# Altium PCB led灯板NO.3pcb.PcbDoc
Units mil, origin at the board's own origin, x right, y up, seen from the top; angles counter-clockwise.
Board outline 2362.2 x 2362.2 mil, 2 copper layers (Top Layer, Bottom Layer); 236 components, 31 nets, 491 pads, 233 vias.
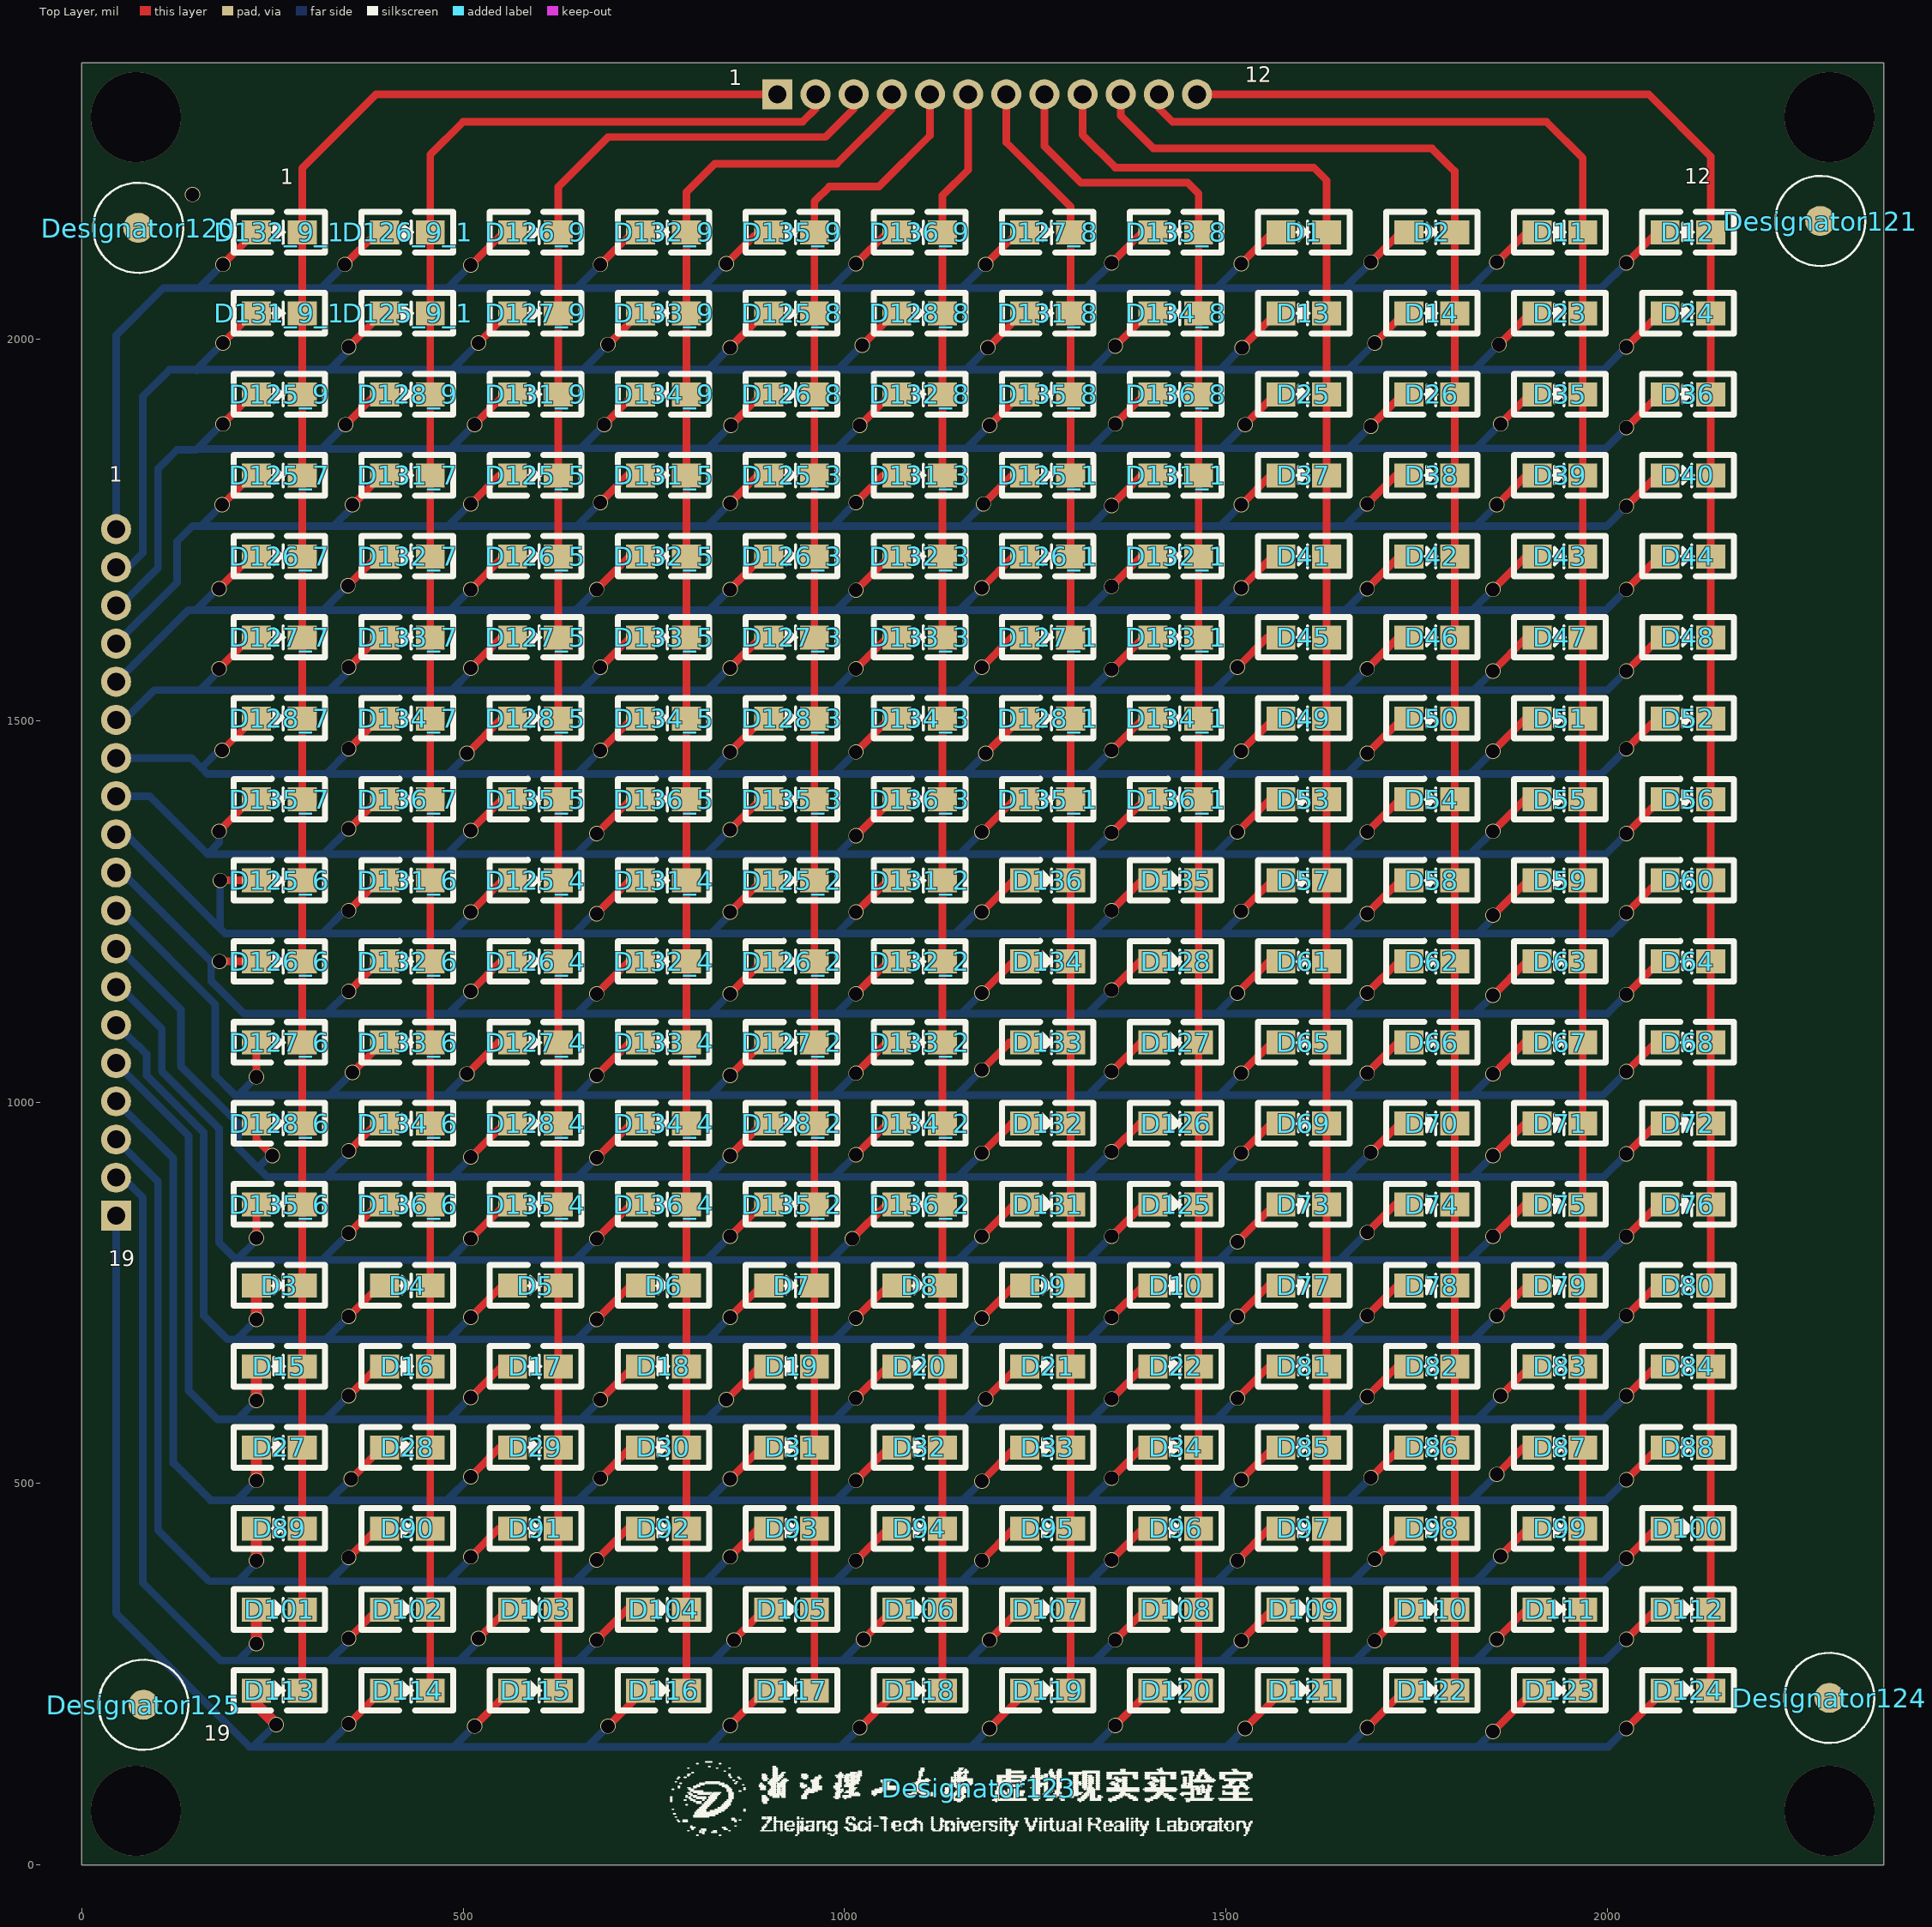
[diagram p0: Top Layer view]
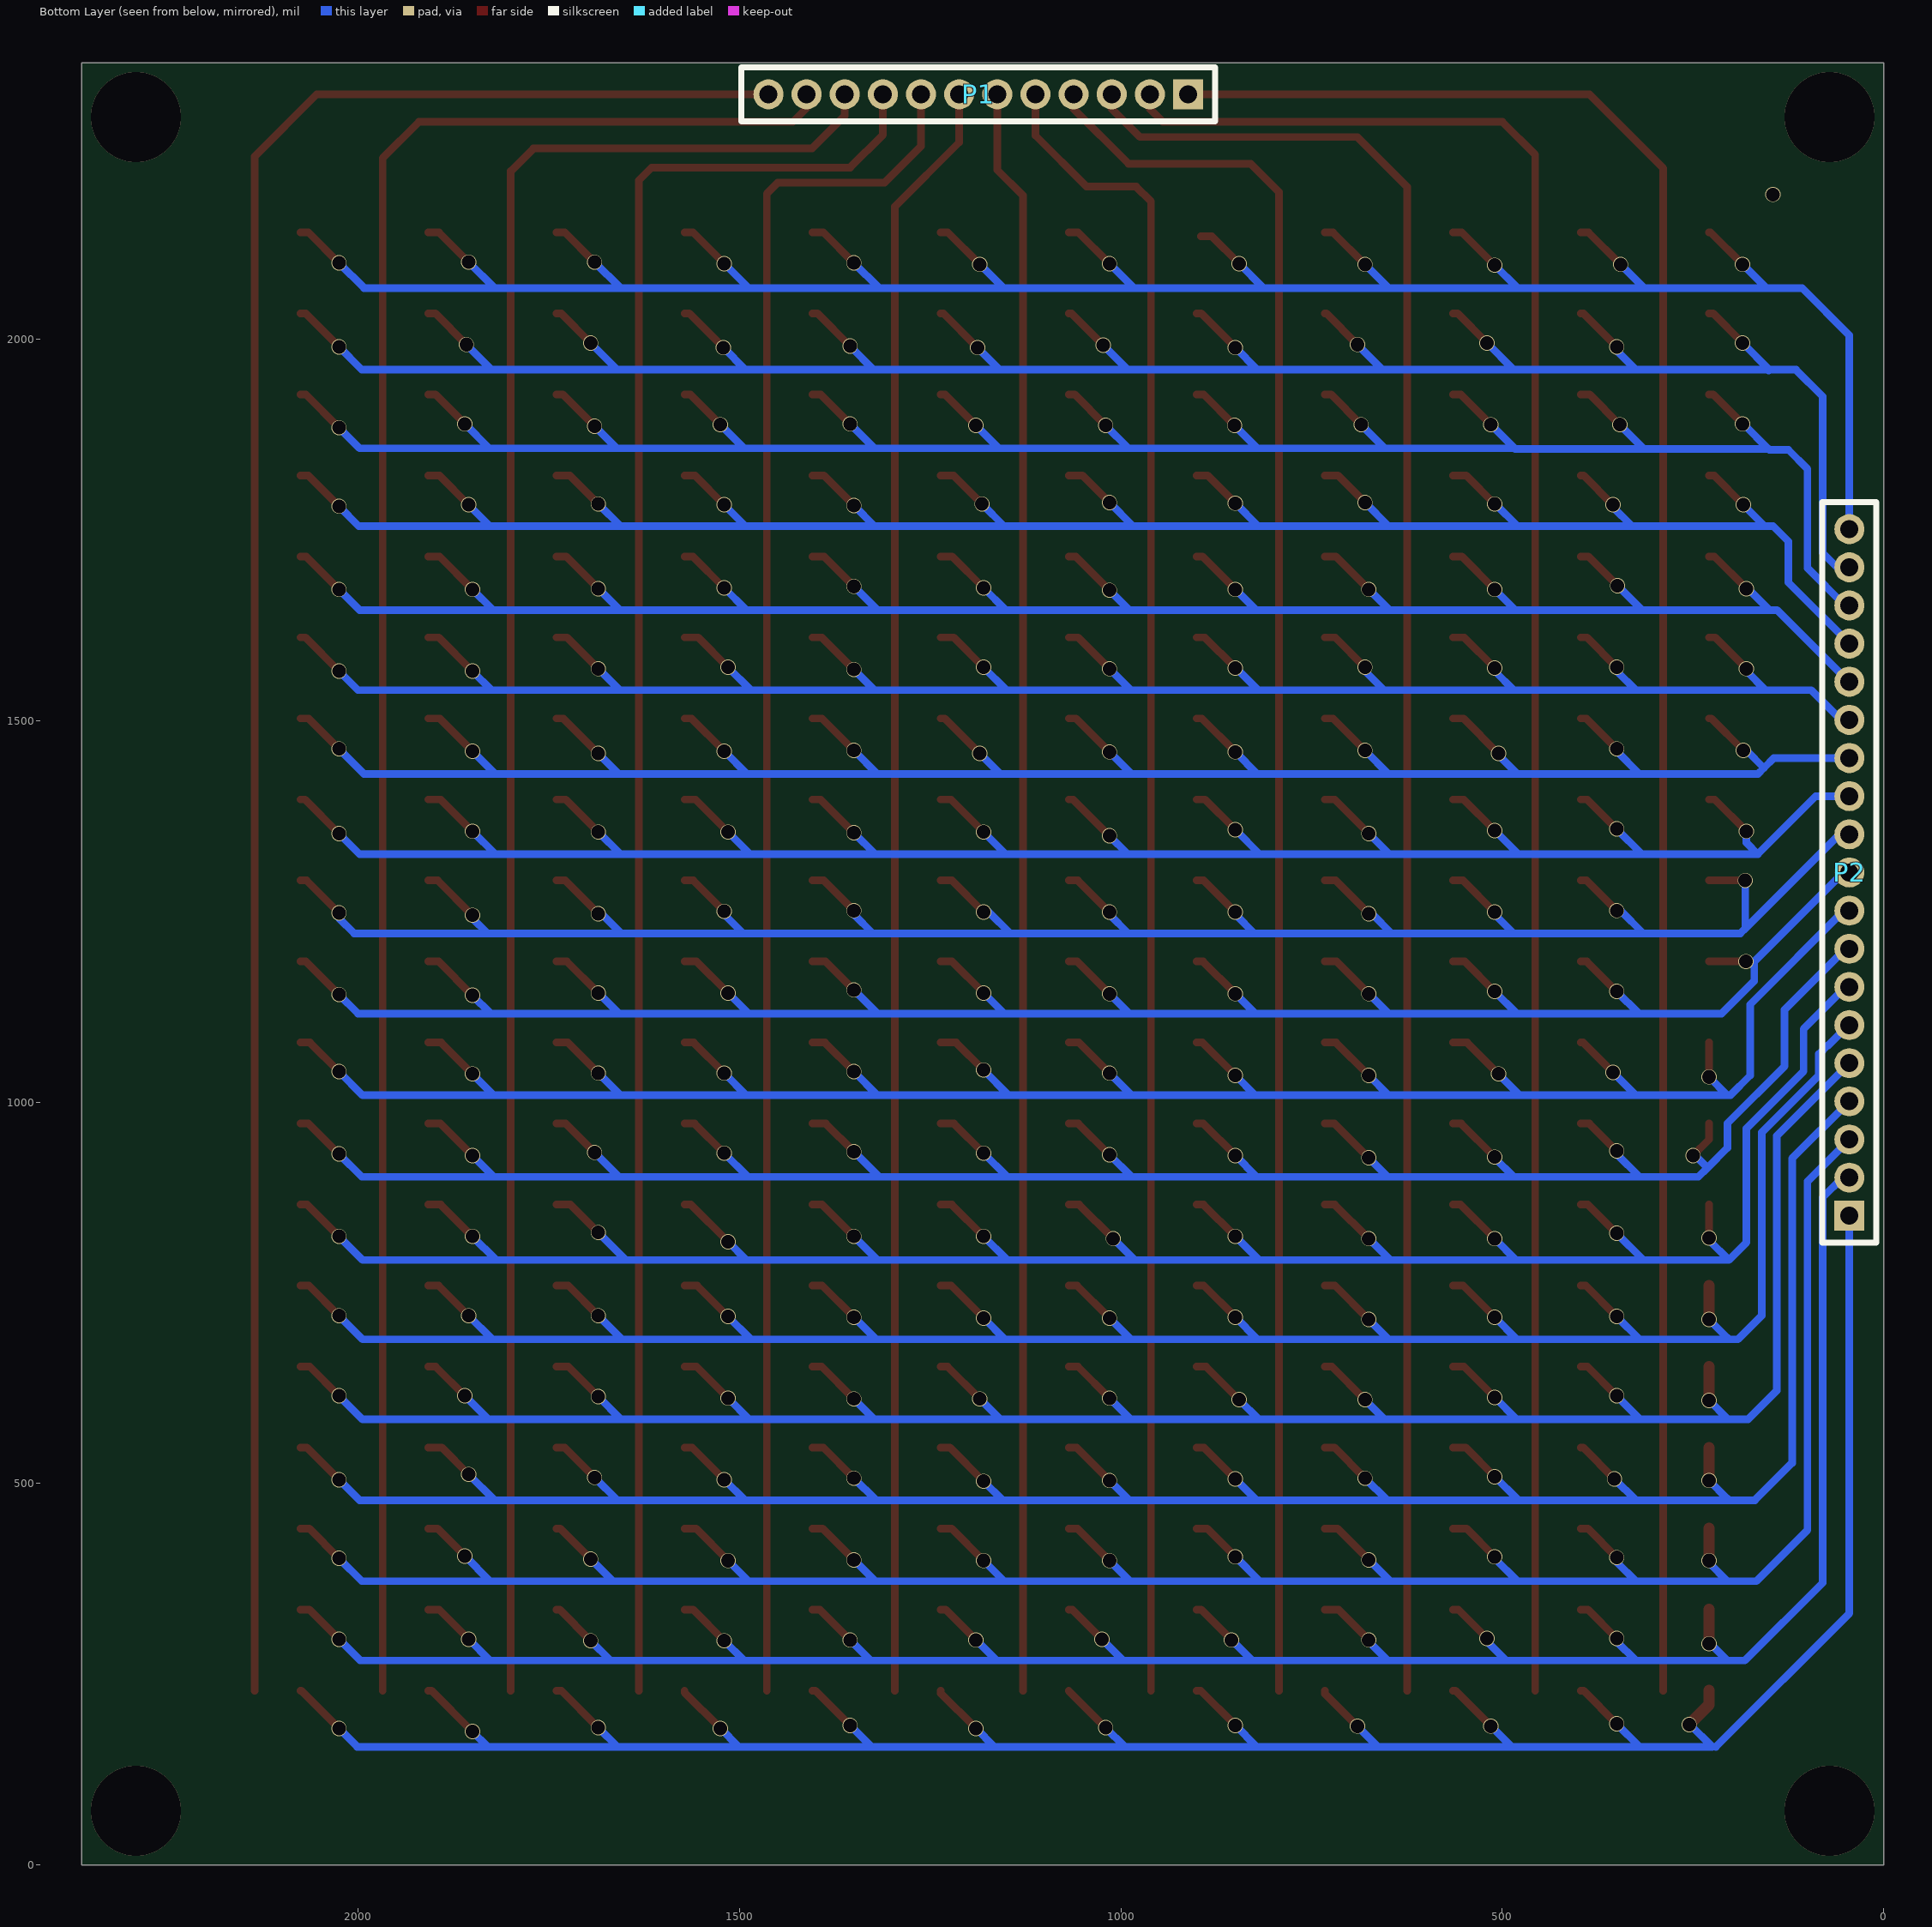
[diagram p1: Bottom Layer view, seen from below]

## Layer stack, top to bottom
Top Layer: signal copper 1.4
Dielectric: dielectric 12.6, FR-4, Dk 4.8
Bottom Layer: signal copper 1.4

## Board outline
0,0 0,2362.2 2362.2,2362.2 2362.2,0

## Design rules (kind name [scope] priority, off if disabled: settings)
Clearance [All] p1: gap=8
HoleSize [All] p1: absolutevalues=TRUE maxlimit=150 minlimit=1 maxpercent=80.000 minpercent=20.000
MinimumSolderMaskSliver [All] p1: minsoldermaskwidth=0
PolygonConnect [All] p1: connectstyle=Relief reliefconductorwidth=10 reliefentries=4 polygonreliefangle="90 Angle" airgapwidth=10
RoutingVias [All] p1: holewidth=28 width=50 viastyle="Through Hole" minholewidth=18 minwidth=10 maxholewidth=28 maxwidth=50
ShortCircuit [All] p1: allowed=TRUE
SilkToSilkClearance [All] p1: silktosilkclearance=3
SilkToSolderMaskClearance [IsPad] p1: minsilkscreentomaskgap=0 clearancetoexposedcopper=TRUE
SolderMaskExpansion [All] p1: expansion=4
Width [All] p1: maxlimit=15 minlimit=5 preferedwidth=10
23 further rules are at their usual default settings.

## Classes and differential pairs
component class led灯板NO.3原理图: D1 D2 D3 D4 D5 D6 D7 D8 D9 D10 D11 D12 D13 D14 D15 D16 D17 D18 D19 D20 D21 D22 D23 D24 D25 D26 D27 D28 D29 D30 D31 D32 D33 D34 D35 D36 D37 D38 D39 D40 D41 D42 D43 D44 D45 D46 D47 D48 D49 D50 D51 D52 D53 D54 D55 D56 D57 D58 D59 D60 D61 D62 D63 D64 D65 D66 D67 D68 D69 D70 D71 D72 D73 D74 D75 D76 D77 D78 D79 D80 D81 D82 D83 D84 D85 D86 D87 D88 D89 D90 D91 D92 D93 D94 D95 D96 D97 D98 D99 D100 D101 D102 D103 D104 D105 D106 D107 D108 D109 D110 D111 D112 D113 D114 D115 D116 D117 D118 D119 D120 D121 D122 D123 D124 P1 P2

## Components (designator, comment, footprint, x,y, rotation, side; value= is the part's Value field where it differs from the comment)
D1 "LED2" LED0603#1 1572.99,2140 r0 top locked
D2 "LED2" LED0603#1 1740.87,2140 r0 top locked
D3 "LED2" LED0603#1 230,759.54 r0 top locked
D4 "LED2" LED0603#1 397.87,759.54 r0 top locked
D5 "LED2" LED0603#1 565.75,759.54 r0 top locked
D6 "LED2" LED0603#1 733.62,759.54 r0 top locked
D7 "LED2" LED0603#1 901.5,759.54 r0 top locked
D8 "LED2" LED0603#1 1069.37,759.54 r0 top locked
D9 "LED2" LED0603#1 1237.24,759.54 r0 top locked
D10 "LED2" LED0603#1 1405.12,759.54 r0 top locked
D11 "LED2" LED0603#1 1908.74,2140 r0 top locked
D12 "LED2" LED0603#1 2076.61,2140 r0 top locked
D13 "LED2" LED0603#1 1572.99,2033.81 r0 top locked
D14 "LED2" LED0603#1 1740.87,2033.81 r0 top locked
D15 "LED2" LED0603#1 230,653.36 r0 top locked
D16 "LED2" LED0603#1 397.87,653.36 r0 top locked
D17 "LED2" LED0603#1 565.75,653.36 r0 top locked
D18 "LED2" LED0603#1 733.62,653.36 r0 top locked
D19 "LED2" LED0603#1 901.5,653.36 r0 top locked
D20 "LED2" LED0603#1 1069.37,653.36 r0 top locked
D21 "LED2" LED0603#1 1237.24,653.36 r0 top locked
D22 "LED2" LED0603#1 1405.12,653.36 r0 top locked
D23 "LED2" LED0603#1 1908.74,2033.81 r0 top locked
D24 "LED2" LED0603#1 2076.61,2033.81 r0 top locked
D25 "LED2" LED0603#1 1572.99,1927.62 r0 top locked
D26 "LED2" LED0603#1 1740.87,1927.62 r0 top locked
D27 "LED2" LED0603#1 230,547.17 r0 top locked
D28 "LED2" LED0603#1 397.87,547.17 r0 top locked
D29 "LED2" LED0603#1 565.75,547.17 r0 top locked
D30 "LED2" LED0603#1 733.62,547.17 r0 top locked
D31 "LED2" LED0603#1 901.5,547.17 r0 top locked
D32 "LED2" LED0603#1 1069.37,547.17 r0 top locked
D33 "LED2" LED0603#1 1237.24,547.17 r0 top locked
D34 "LED2" LED0603#1 1405.12,547.17 r0 top locked
D35 "LED2" LED0603#1 1908.74,1927.62 r0 top locked
D36 "LED2" LED0603#1 2076.61,1927.62 r0 top locked
D37 "LED2" LED0603#1 1572.99,1821.43 r0 top locked
D38 "LED2" LED0603#1 1740.87,1821.43 r0 top locked
D39 "LED2" LED0603#1 1908.74,1821.43 r0 top locked
D40 "LED2" LED0603#1 2076.61,1821.43 r0 top locked
D41 "LED2" LED0603#1 1572.99,1715.24 r0 top locked
D42 "LED2" LED0603#1 1740.87,1715.24 r0 top locked
D43 "LED2" LED0603#1 1908.74,1715.24 r0 top locked
D44 "LED2" LED0603#1 2076.61,1715.24 r0 top locked
D45 "LED2" LED0603#1 1572.99,1609.06 r0 top locked
D46 "LED2" LED0603#1 1740.87,1609.06 r0 top locked
D47 "LED2" LED0603#1 1908.74,1609.06 r0 top locked
D48 "LED2" LED0603#1 2076.61,1609.06 r0 top locked
D49 "LED2" LED0603#1 1572.99,1502.87 r0 top locked
D50 "LED2" LED0603#1 1740.87,1502.87 r0 top locked
D51 "LED2" LED0603#1 1908.74,1502.87 r0 top locked
D52 "LED2" LED0603#1 2076.61,1502.87 r0 top locked
D53 "LED2" LED0603#1 1572.99,1396.68 r0 top locked
D54 "LED2" LED0603#1 1740.87,1396.68 r0 top locked
D55 "LED2" LED0603#1 1908.74,1396.68 r0 top locked
D56 "LED2" LED0603#1 2076.61,1396.68 r0 top locked
D57 "LED2" LED0603#1 1572.99,1290.49 r0 top locked
D58 "LED2" LED0603#1 1740.87,1290.49 r0 top locked
D59 "LED2" LED0603#1 1908.74,1290.49 r0 top locked
D60 "LED2" LED0603#1 2076.61,1290.49 r0 top locked
D61 "LED2" LED0603#1 1572.99,1184.3 r0 top locked
D62 "LED2" LED0603#1 1740.87,1184.3 r0 top locked
D63 "LED2" LED0603#1 1908.74,1184.3 r0 top locked
D64 "LED2" LED0603#1 2076.61,1184.3 r0 top locked
D65 "LED2" LED0603#1 1572.99,1078.11 r0 top locked
D66 "LED2" LED0603#1 1740.87,1078.11 r0 top locked
D67 "LED2" LED0603#1 1908.74,1078.11 r0 top locked
D68 "LED2" LED0603#1 2076.61,1078.11 r0 top locked
D69 "LED2" LED0603#1 1572.99,971.92 r0 top locked
D70 "LED2" LED0603#1 1740.87,971.92 r0 top locked
D71 "LED2" LED0603#1 1908.74,971.92 r0 top locked
D72 "LED2" LED0603#1 2076.61,971.92 r0 top locked
D73 "LED2" LED0603#1 1572.99,865.73 r0 top locked
D74 "LED2" LED0603#1 1740.87,865.73 r0 top locked
D75 "LED2" LED0603#1 1908.74,865.73 r0 top locked
D76 "LED2" LED0603#1 2076.61,865.73 r0 top locked
D77 "LED2" LED0603#1 1572.99,759.54 r0 top locked
D78 "LED2" LED0603#1 1740.87,759.54 r0 top locked
D79 "LED2" LED0603#1 1908.74,759.54 r0 top locked
D80 "LED2" LED0603#1 2076.61,759.54 r0 top locked
D81 "LED2" LED0603#1 1572.99,653.36 r0 top locked
D82 "LED2" LED0603#1 1740.87,653.36 r0 top locked
D83 "LED2" LED0603#1 1908.74,653.36 r0 top locked
D84 "LED2" LED0603#1 2076.61,653.36 r0 top locked
D85 "LED2" LED0603#1 1572.99,547.17 r0 top locked
D86 "LED2" LED0603#1 1740.87,547.17 r0 top locked
D87 "LED2" LED0603#1 1908.74,547.17 r0 top locked
D88 "LED2" LED0603#1 2076.61,547.17 r0 top locked
D89 "LED2" LED0603#1 230,440.98 r0 top locked
D90 "LED2" LED0603#1 397.87,440.98 r0 top locked
D91 "LED2" LED0603#1 565.75,440.98 r0 top locked
D92 "LED2" LED0603#1 733.62,440.98 r0 top locked
D93 "LED2" LED0603#1 901.5,440.98 r0 top locked
D94 "LED2" LED0603#1 1069.37,440.98 r0 top locked
D95 "LED2" LED0603#1 1237.24,440.98 r0 top locked
D96 "LED2" LED0603#1 1405.12,440.98 r0 top locked
D97 "LED2" LED0603#1 1572.99,440.98 r0 top locked
D98 "LED2" LED0603#1 1740.87,440.98 r0 top locked
D99 "LED2" LED0603#1 1908.74,440.98 r0 top locked
D100 "LED2" LED0603#1 2076.61,440.98 r0 top locked
D101 "LED2" LED0603#1 230,334.79 r0 top locked
D102 "LED2" LED0603#1 397.87,334.79 r0 top locked
D103 "LED2" LED0603#1 565.75,334.79 r0 top locked
D104 "LED2" LED0603#1 733.62,334.79 r0 top locked
D105 "LED2" LED0603#1 901.5,334.79 r0 top locked
D106 "LED2" LED0603#1 1069.37,334.79 r0 top locked
D107 "LED2" LED0603#1 1237.24,334.79 r0 top locked
D108 "LED2" LED0603#1 1405.12,334.79 r0 top locked
D109 "LED2" LED0603#1 1572.99,334.79 r0 top locked
D110 "LED2" LED0603#1 1740.87,334.79 r0 top locked
D111 "LED2" LED0603#1 1908.74,334.79 r0 top locked
D112 "LED2" LED0603#1 2076.61,334.79 r0 top locked
D113 "LED2" LED0603#1 230,228.6 r0 top locked
D114 "LED2" LED0603#1 397.87,228.6 r0 top locked
D115 "LED2" LED0603#1 565.75,228.6 r0 top locked
D116 "LED2" LED0603#1 733.62,228.6 r0 top locked
D117 "LED2" LED0603#1 901.5,228.6 r0 top locked
D118 "LED2" LED0603#1 1069.37,228.6 r0 top locked
D119 "LED2" LED0603#1 1237.24,228.6 r0 top locked
D120 "LED2" LED0603#1 1405.12,228.6 r0 top locked
D121 "LED2" LED0603#1 1572.99,228.6 r0 top locked
D122 "LED2" LED0603#1 1740.87,228.6 r0 top locked
D123 "LED2" LED0603#1 1908.74,228.6 r0 top locked
D124 "LED2" LED0603#1 2076.61,228.6 r0 top locked
D125 "LED2" LED0603#1 1405.12,865.73 r0 top locked
D125_1 "LED2" LED0603#1 1237.24,1821.43 r0 top locked
D125_2 "LED2" LED0603#1 901.5,1290.49 r0 top locked
D125_3 "LED2" LED0603#1 901.5,1821.43 r0 top locked
D125_4 "LED2" LED0603#1 565.75,1290.49 r0 top locked
D125_5 "LED2" LED0603#1 565.75,1821.43 r0 top locked
D125_6 "LED2" LED0603#1 230,1290.49 r0 top locked
D125_7 "LED2" LED0603#1 230,1821.43 r0 top locked
D125_8 "LED2" LED0603#1 901.5,2033.81 r0 top locked
D125_9 "LED2" LED0603#1 230,1927.62 r0 top locked
D125_9_1 "LED2" LED0603#1 397.87,2033.81 r0 top locked
D126 "Comment" LED0603#1 1405.12,971.92 r0 top locked
D126_1 "Comment" LED0603#1 1237.24,1715.24 r0 top locked
D126_2 "Comment" LED0603#1 901.5,1184.3 r0 top locked
D126_3 "Comment" LED0603#1 901.5,1715.24 r0 top locked
D126_4 "Comment" LED0603#1 565.75,1184.3 r0 top locked
D126_5 "Comment" LED0603#1 565.75,1715.24 r0 top locked
D126_6 "Comment" LED0603#1 230,1184.3 r0 top locked
D126_7 "Comment" LED0603#1 230,1715.24 r0 top locked
D126_8 "Comment" LED0603#1 901.5,1927.62 r0 top locked
D126_9 "Comment" LED0603#1 565.75,2140 r0 top locked
D126_9_1 "Comment" LED0603#1 397.87,2140 r0 top locked
D127 "Comment" LED0603#1 1405.12,1078.11 r0 top locked
D127_1 "Comment" LED0603#1 1237.24,1609.05 r0 top locked
D127_2 "Comment" LED0603#1 901.5,1078.11 r0 top locked
D127_3 "Comment" LED0603#1 901.5,1609.05 r0 top locked
D127_4 "Comment" LED0603#1 565.75,1078.11 r0 top locked
D127_5 "Comment" LED0603#1 565.75,1609.05 r0 top locked
D127_6 "Comment" LED0603#1 230,1078.11 r0 top locked
D127_7 "Comment" LED0603#1 230,1609.05 r0 top locked
D127_8 "Comment" LED0603#1 1237.24,2140 r0 top locked
D127_9 "Comment" LED0603#1 565.75,2033.81 r0 top locked
D128 "Comment" LED0603#1 1405.12,1184.3 r0 top locked
D128_1 "Comment" LED0603#1 1237.24,1502.87 r0 top locked
D128_2 "Comment" LED0603#1 901.5,971.92 r0 top locked
D128_3 "Comment" LED0603#1 901.5,1502.87 r0 top locked
D128_4 "Comment" LED0603#1 565.75,971.92 r0 top locked
D128_5 "Comment" LED0603#1 565.75,1502.87 r0 top locked
D128_6 "Comment" LED0603#1 230,971.92 r0 top locked
D128_7 "Comment" LED0603#1 230,1502.87 r0 top locked
D128_8 "Comment" LED0603#1 1069.37,2033.81 r0 top locked
D128_9 "Comment" LED0603#1 397.87,1927.62 r0 top locked
D131 "Comment" LED0603#1 1237.24,865.73 r0 top locked
D131_1 "Comment" LED0603#1 1405.12,1821.43 r0 top locked
D131_2 "Comment" LED0603#1 1069.37,1290.49 r0 top locked
D131_3 "Comment" LED0603#1 1069.37,1821.43 r0 top locked
D131_4 "Comment" LED0603#1 733.62,1290.49 r0 top locked
D131_5 "Comment" LED0603#1 733.62,1821.43 r0 top locked
D131_6 "Comment" LED0603#1 397.87,1290.49 r0 top locked
D131_7 "Comment" LED0603#1 397.87,1821.43 r0 top locked
D131_8 "Comment" LED0603#1 1237.24,2033.81 r0 top locked
D131_9 "Comment" LED0603#1 565.75,1927.62 r0 top locked
D131_9_1 "Comment" LED0603#1 230,2033.81 r0 top locked
D132 "Comment" LED0603#1 1237.24,971.92 r0 top locked
D132_1 "Comment" LED0603#1 1405.12,1715.24 r0 top locked
D132_2 "Comment" LED0603#1 1069.37,1184.3 r0 top locked
D132_3 "Comment" LED0603#1 1069.37,1715.24 r0 top locked
D132_4 "Comment" LED0603#1 733.62,1184.3 r0 top locked
D132_5 "Comment" LED0603#1 733.62,1715.24 r0 top locked
D132_6 "Comment" LED0603#1 397.87,1184.3 r0 top locked
D132_7 "Comment" LED0603#1 397.87,1715.24 r0 top locked
D132_8 "Comment" LED0603#1 1069.37,1927.62 r0 top locked
D132_9 "Comment" LED0603#1 733.62,2140 r0 top locked
D132_9_1 "Comment" LED0603#1 230,2140 r0 top locked
D133 "Comment" LED0603#1 1237.24,1078.11 r0 top locked
D133_1 "Comment" LED0603#1 1405.12,1609.05 r0 top locked
D133_2 "Comment" LED0603#1 1069.37,1078.11 r0 top locked
D133_3 "Comment" LED0603#1 1069.37,1609.05 r0 top locked
D133_4 "Comment" LED0603#1 733.62,1078.11 r0 top locked
D133_5 "Comment" LED0603#1 733.62,1609.05 r0 top locked
D133_6 "Comment" LED0603#1 397.87,1078.11 r0 top locked
D133_7 "Comment" LED0603#1 397.87,1609.05 r0 top locked
D133_8 "Comment" LED0603#1 1405.12,2140 r0 top locked
D133_9 "Comment" LED0603#1 733.62,2033.81 r0 top locked
D134 "Comment" LED0603#1 1237.24,1184.3 r0 top locked
D134_1 "Comment" LED0603#1 1405.12,1502.87 r0 top locked
D134_2 "Comment" LED0603#1 1069.37,971.92 r0 top locked
D134_3 "Comment" LED0603#1 1069.37,1502.87 r0 top locked
D134_4 "Comment" LED0603#1 733.62,971.92 r0 top locked
D134_5 "Comment" LED0603#1 733.62,1502.87 r0 top locked
D134_6 "Comment" LED0603#1 397.87,971.92 r0 top locked
D134_7 "Comment" LED0603#1 397.87,1502.87 r0 top locked
D134_8 "Comment" LED0603#1 1405.12,2033.81 r0 top locked
D134_9 "Comment" LED0603#1 733.62,1927.62 r0 top locked
D135 "Comment" LED0603#1 1405.12,1290.49 r0 top locked
D135_1 "Comment" LED0603#1 1237.24,1396.68 r0 top locked
D135_2 "Comment" LED0603#1 901.5,865.73 r0 top locked
D135_3 "Comment" LED0603#1 901.5,1396.68 r0 top locked
D135_4 "Comment" LED0603#1 565.75,865.73 r0 top locked
D135_5 "Comment" LED0603#1 565.75,1396.68 r0 top locked
D135_6 "Comment" LED0603#1 230,865.73 r0 top locked
D135_7 "Comment" LED0603#1 230,1396.68 r0 top locked
D135_8 "Comment" LED0603#1 1237.24,1927.62 r0 top locked
D135_9 "Comment" LED0603#2 901.5,2140 r0 top locked
D136 "Comment" LED0603#1 1237.24,1290.49 r0 top locked
D136_1 "Comment" LED0603#1 1405.12,1396.68 r0 top locked
D136_2 "Comment" LED0603#1 1069.37,865.73 r0 top locked
D136_3 "Comment" LED0603#1 1069.37,1396.68 r0 top locked
D136_4 "Comment" LED0603#1 733.62,865.73 r0 top locked
D136_5 "Comment" LED0603#1 733.62,1396.68 r0 top locked
D136_6 "Comment" LED0603#1 397.87,865.73 r0 top locked
D136_7 "Comment" LED0603#1 397.87,1396.68 r0 top locked
D136_8 "Comment" LED0603#1 1405.12,1927.62 r0 top locked
D136_9 "Comment" LED0603#1 1069.37,2140 r0 top locked
Designator120 "Comment" "mark my" 74,2146 r0 top locked
Designator121 "Comment" "mark my" 2279,2155 r0 top locked
Designator122 "Comment" PCBComponent_1 319,2886 r0 top locked
Designator123 "Comment" "logo xn" 1176,101 r0 top locked
Designator124 "Comment" "mark my" 2291,219 r180 top locked
Designator125 "Comment" "mark my" 81,210 r180 top locked
P1 "MHDR1X12" MHDR1X12 912,2321 r0 bottom locked
P2 "MHDR1X19" MHDR1X19 45,851 r90 bottom locked

## Footprints (in the part's own frame and the unit in brackets; to place one, negate y for a bottom-side part, rotate by r counter-clockwise, add the part's x,y. Pads: shape width x height; smd on the part's side, far side on the other; paste and mask are expansions set on the pad)
LED0603#1 [mm]
  rect 0.965x0.8 smd: 1(-0.025,0) 2(1.499,0)
  silkscreen extent -0.79,-0.67 2.26,0.69
LED0603#2 [mm]
  rect 0.965x0.8 smd paste+0: 1(-0.025,0)
  rect 0.965x0.8 smd: 2(1.499,0)
  silkscreen extent -0.79,-0.67 2.26,0.69
"logo xn" [mil]
  silkscreen extent -404,-62 358,34
"mark my" [mm]
  round 1 smd: 0(0,0)
  silkscreen extent -1.5,-1.5 1.5,1.5
MHDR1X12 [mm] "Connector; Header; 12 Position"
  rect 1x1 hole 0.6: 1(0,0)
  round 1 hole 0.6: 2(1.27,0) 3(2.54,0) 4(3.81,0) 5(5.08,0) 6(6.35,0) 7(7.62,0) 8(8.89,0) 9(10.16,0) 10(11.43,0) 11(12.7,0) 12(13.97,0)
  silkscreen extent -0.9,-0.9 14.87,0.9
MHDR1X19 [mm] "Connector; Header; 19 Position"
  rect 1x1 hole 0.6: 1(0,0)
  round 1 hole 0.6: 2(1.27,0) 3(2.54,0) 4(3.81,0) 5(5.08,0) 6(6.35,0) 7(7.62,0) 8(8.89,0) 9(10.16,0) 10(11.43,0) 11(12.7,0) 12(13.97,0) 13(15.24,0) 14(16.51,0) 15(17.78,0) 16(19.05,0) 17(20.32,0) 18(21.59,0) 19(22.86,0)
  silkscreen extent -0.9,-0.9 23.76,0.9
PCBComponent_1 [mil]

## Part data
D1 D2 D3 D4 D5 D6 D7 D8 D9 D10 D11 D12 D13 D14 D15 D16 D17 D18 D19 D20 D21 D22 D23 D24 D25 D26 D27 D28 D29 D30 D31 D32 D33 D34 D35 D36 D37 D38 D39 D40 D41 D42 D43 D44 D45 D46 D47 D48 D49 D50 D51 D52 D53 D54 D55 D56 D57 D58 D59 D60 D61 D62 D63 D64 D65 D66 D67 D68 D69 D70 D71 D72 D73 D74 D75 D76 D77 D78 D79 D80 D81 D82 D83 D84 D85 D86 D87 D88 D89 D90 D91 D92 D93 D94 D95 D96 D97 D98 D99 D100 D101 D102 D103 D104 D105 D106 D107 D108 D109 D110 D111 D112 D113 D114 D115 D116 D117 D118 D119 D120 D121 D122 D123 D124: "Typical RED, GREEN, YELLOW, AMBER GaAs LED"
P1: "Header, 12-Pin"
P2: "Header, 19-Pin"

## Via types
v1: diameter 20, hole 18, Top Layer to Bottom Layer, 229 vias
v2: diameter 118.11, hole 118.11, Top Layer to Bottom Layer, tented both sides, 4 vias

## Nets (pads, with @x,y where several pads share a name; then routed paths per layer and width w, separated by ;. In a path a pad name is that pad's centre, name@x,y a point inside that pad or via, vN(x,y) a via of type N, cw(c..) or ccw(c..) an arc to the next point about the centre after c; other vN are vias at no path point)
NETD1: D1.1 D2.1 D11.1 D12.1 D126_9.1 D126_9_1.1 D127_8.1 D132_9.1 D132_9_1.1 D133_8.1 D135_9.1 D136_9.1 P2.19 | length 3588.6
  Top Layer w10: v1(185,2098) 227,2140 D132_9_1.1 ; v1(345,2098) 387,2140 D126_9_1.1 ; v1(510,2097) 553,2140 D126_9.1 ; v1(680,2098) 722,2140 D132_9.1 ; v1(845,2099) 881,2135 D135_9.1@895,2135 ; v1(1015,2099) 1056,2140 D136_9.1 ; v1(1185,2098) 1227,2140 D127_8.1 ; v1(1350,2100) 1390,2140 D133_8.1 ; v1(1520,2099) 1561,2140 D1.1 ; v1(1690,2101) 1729,2140 D2.1 ; v1(1855,2101) 1894,2140 D11.1 ; v1(2025,2100) 2065,2140 D12.1
  Bottom Layer w10: P2.19 45,2005 107,2067 154,2067 ; v1(185,2098) 154,2067 ; v1(345,2098) 314,2067 ; v1(510,2097) 480,2067 ; v1(680,2098) 649,2067 ; v1(845,2099) 813,2067 ; v1(1015,2099) 983,2067 ; v1(1185,2098) 1154,2067 ; v1(1350,2100) 1317,2067 ; v1(1520,2099) 1488,2067 ; v1(1690,2101) 1656,2067 ; v1(1855,2101) 1821,2067 ; v1(2025,2100) 1992,2067 1821,2067 ; 154,2067 314,2067 ; 314,2067 480,2067 ; 480,2067 649,2067 ; 649,2067 813,2067 ; 813,2067 983,2067 ; 983,2067 1154,2067 ; 1154,2067 1317,2067 ; 1317,2067 1488,2067 ; 1488,2067 1656,2067 ; 1656,2067 1821,2067
NetD1_1: D3.1 D4.1 D5.1 D6.1 D7.1 D8.1 D9.1 D10.1 D77.1 D78.1 D79.1 D80.1 P2.6 | length 3589.2
  Top Layer w10: v1(350,719) 390.54,759.54 D4.1 ; v1(510,718) 551.54,759.54 D5.1 ; v1(675,715) 719.54,759.54 D6.1 ; v1(850,718) 891.54,759.54 D7.1 ; v1(1015,717) 1057.54,759.54 D8.1 ; v1(1180,717) 1222.54,759.54 D9.1 ; v1(1350,718) 1391.54,759.54 D10.1 ; v1(1515,719) 1555.54,759.54 D77.1 ; v1(1685,720) 1724.54,759.54 D78.1 ; v1(1855,720) 1894.54,759.54 D79.1 ; v1(2025,720) 2064.54,759.54 D80.1
  Top Layer w15: v1(229,715) D3.1
  Bottom Layer w10: P2.6 46,1101 72.5,1074.5 73.5,1074.5 85,1063 85,1035.04 160,960.04 160,720 191,689 205,689 ; v1(229,715) 205,691 205,689 ; v1(350,719) 320,689 ; v1(510,718) 481,689 ; v1(675,715) 649,689 ; v1(850,718) 821,689 ; v1(1015,717) 987,689 ; v1(1180,717) 1152,689 ; v1(1350,718) 1321,689 ; v1(1515,719) 1485,689 ; v1(1685,720) 1654,689 ; v1(1855,720) 1824,689 ; v1(2025,720) 1994,689 1824,689 ; 205,689 320,689 ; 320,689 481,689 ; 481,689 649,689 ; 649,689 821,689 ; 821,689 987,689 ; 987,689 1152,689 ; 1152,689 1321,689 ; 1321,689 1485,689 ; 1485,689 1654,689 ; 1654,689 1824,689
NetD1_2: D1.2 D13.2 D25.2 D37.2 D41.2 D45.2 D49.2 D53.2 D57.2 D61.2 D65.2 D69.2 D73.2 D77.2 D81.2 D85.2 D97.2 D109.2 D121.2 P1.9 | length 2377.2
  Top Layer w10: P1.9 1312,2268 1355,2225 1615,2225 1631.99,2208.01 D1.2 D13.2 D25.2 D37.2 D41.2 D45.2 D49.2 D53.2 D57.2 D61.2 D65.2 D69.2 D73.2 D77.2 D81.2 D85.2 D97.2 D109.2 D121.2
NetD2_2: D2.2 D14.2 D26.2 D38.2 D42.2 D46.2 D50.2 D54.2 D58.2 D62.2 D66.2 D70.2 D74.2 D78.2 D82.2 D86.2 D98.2 D110.2 D122.2 P1.10 | length 2487.6
  Top Layer w10: P1.10 1362,2293 1405,2250 1770,2250 1799.87,2220.13 D2.2 D14.2 D26.2 D38.2 D42.2 D46.2 D50.2 D54.2 D58.2 D62.2 D66.2 D70.2 D74.2 D78.2 D82.2 D86.2 D98.2 D110.2 D122.2
NetD3_2: D3.2 D15.2 D27.2 D89.2 D101.2 D113.2 D125_6.2 D125_7.2 D125_9.2 D126_6.2 D126_7.2 D127_6.2 D127_7.2 D128_6.2 D128_7.2 D131_9_1.2 D132_9_1.2 D135_6.2 D135_7.2 P1.1 | length 2658.6
  Top Layer w10: D113.2 D101.2 D89.2 D27.2 D15.2 D3.2 D135_6.2 D128_6.2 D127_6.2 D126_6.2 D125_6.2 D135_7.2 D128_7.2 D127_7.2 D126_7.2 D125_7.2 D125_9.2 D131_9_1.2 D132_9_1.2 289,2224 386,2321 P1.1
NetD4_2: D4.2 D16.2 D28.2 D90.2 D102.2 D114.2 D125_9_1.2 D126_9_1.2 D128_9.2 D131_6.2 D131_7.2 D132_6.2 D132_7.2 D133_6.2 D133_7.2 D134_6.2 D134_7.2 D136_6.2 D136_7.2 P1.2 | length 2562.3
  Top Layer w10: D114.2 D102.2 D90.2 D28.2 D16.2 D4.2 D136_6.2 D134_6.2 D133_6.2 D132_6.2 D131_6.2 D136_7.2 D134_7.2 D133_7.2 D132_7.2 D131_7.2 D128_9.2 D125_9_1.2 D126_9_1.2 456.87,2241.87 500,2285 945,2285 962,2302 P1.2
NetD5_2: D5.2 D17.2 D29.2 D91.2 D103.2 D115.2 D125_4.2 D125_5.2 D126_4.2 D126_5.2 D126_9.2 D127_4.2 D127_5.2 D127_9.2 D128_4.2 D128_5.2 D131_9.2 D135_4.2 D135_5.2 P1.3 | length 2419.8
  Top Layer w10: D115.2 D103.2 D91.2 D29.2 D17.2 D5.2 D135_4.2 D128_4.2 D127_4.2 D126_4.2 D125_4.2 D135_5.2 D128_5.2 D127_5.2 D126_5.2 D125_5.2 D131_9.2 D127_9.2 D126_9.2 624.75,2199.75 690,2265 975,2265 1012,2302 P1.3
NetD6_2: D6.2 D18.2 D30.2 D92.2 D104.2 D116.2 D131_4.2 D131_5.2 D132_4.2 D132_5.2 D132_9.2 D133_4.2 D133_5.2 D133_9.2 D134_4.2 D134_5.2 D134_9.2 D136_4.2 D136_5.2 P1.4 | length 2297.7
  Top Layer w10: D116.2 D104.2 D92.2 D30.2 D18.2 D6.2 D136_4.2 D134_4.2 D133_4.2 D132_4.2 D131_4.2 D136_5.2 D134_5.2 D133_5.2 D132_5.2 D131_5.2 D134_9.2 D133_9.2 D132_9.2 792.62,2192.62 830,2230 990,2230 1062,2302 P1.4
NetD7_2: D7.2 D19.2 D31.2 D93.2 D105.2 D117.2 D125_2.2 D125_3.2 D125_8.2 D126_2.2 D126_3.2 D126_8.2 D127_2.2 D127_3.2 D128_2.2 D128_3.2 D135_2.2 D135_3.2 D135_9.2 P1.5 | length 2193.2
  Top Layer w10: D117.2 D105.2 D93.2 D31.2 D19.2 D7.2 D135_2.2 D128_2.2 D127_2.2 D126_2.2 D125_2.2 D135_3.2 D128_3.2 D127_3.2 D126_3.2 D125_3.2 D126_8.2 D125_8.2 D135_9.2 960.5,2180.5 980,2200 1045,2200 1112,2267 P1.5
NetD8_2: D8.2 D20.2 D32.2 D94.2 D106.2 D118.2 D128_8.2 D131_2.2 D131_3.2 D132_2.2 D132_3.2 D132_8.2 D133_2.2 D133_3.2 D134_2.2 D134_3.2 D136_2.2 D136_3.2 D136_9.2 P1.6 | length 2106.3
  Top Layer w10: D118.2 D106.2 D94.2 D32.2 D20.2 D8.2 D136_2.2 D134_2.2 D133_2.2 D132_2.2 D131_2.2 D136_3.2 D134_3.2 D133_3.2 D132_3.2 D131_3.2 D132_8.2 D128_8.2 D136_9.2 1128.37,2188.37 1162,2222 P1.6
NetD9_2: D9.2 D21.2 D33.2 D95.2 D107.2 D119.2 D125_1.2 D126_1.2 D127_1.2 D127_8.2 D128_1.2 D131.2 D131_8.2 D132.2 D133.2 D134.2 D135_1.2 D135_8.2 D136.2 P1.7 | length 2127.3
  Top Layer w10: P1.7 1212,2258 1296.24,2173.76 D127_8.2 D131_8.2 D135_8.2 D125_1.2 D126_1.2 D127_1.2 D128_1.2 D135_1.2 D136.2 D134.2 D133.2 D132.2 D131.2 D9.2 D21.2 D33.2 D95.2 D107.2 D119.2
NetD10_2: D10.2 D22.2 D34.2 D96.2 D108.2 D120.2 D125.2 D126.2 D127.2 D128.2 D131_1.2 D132_1.2 D133_1.2 D133_8.2 D134_1.2 D134_8.2 D135.2 D136_1.2 D136_8.2 P1.8 | length 2258.1
  Top Layer w10: P1.8 1262,2253 1310,2205 1450,2205 1464.12,2190.88 D133_8.2 D134_8.2 D136_8.2 D131_1.2 D132_1.2 D133_1.2 D134_1.2 D136_1.2 D135.2 D128.2 D127.2 D126.2 D125.2 D10.2 D22.2 D34.2 D96.2 D108.2 D120.2
NetD11_2: D11.2 D23.2 D35.2 D39.2 D43.2 D47.2 D51.2 D55.2 D59.2 D63.2 D67.2 D71.2 D75.2 D79.2 D83.2 D87.2 D99.2 D111.2 D123.2 P1.11 | length 2609.6
  Top Layer w10: P1.11 1412,2303 1430,2285 1920,2285 1967.74,2237.26 D11.2 D23.2 D35.2 D39.2 D43.2 D47.2 D51.2 D55.2 D59.2 D63.2 D67.2 D71.2 D75.2 D79.2 D83.2 D87.2 D99.2 D111.2 D123.2
NetD12_2: D12.2 D24.2 D36.2 D40.2 D44.2 D48.2 D52.2 D56.2 D60.2 D64.2 D68.2 D72.2 D76.2 D80.2 D84.2 D88.2 D100.2 D112.2 D124.2 P1.12 | length 2718.2
  Top Layer w10: P1.12 2054,2321 2135.61,2239.39 D12.2 D24.2 D36.2 D40.2 D44.2 D48.2 D52.2 D56.2 D60.2 D64.2 D68.2 D72.2 D76.2 D80.2 D84.2 D88.2 D100.2 D112.2 D124.2
NetD13_1: D15.1 D16.1 D17.1 D18.1 D19.1 D20.1 D21.1 D22.1 D81.1 D82.1 D83.1 D84.1 P2.5 | length 3626.1
  Top Layer w10: v1(350,615) 388.36,653.36 D16.1 ; v1(510,613) 550.36,653.36 D17.1 ; v1(680,610) 723.36,653.36 D18.1 ; v1(845,610) 888.36,653.36 D19.1 ; v1(1015,612) 1056.36,653.36 D20.1 ; v1(1185,611) 1227.36,653.36 D21.1 ; v1(1350,611) 1392.36,653.36 D22.1 ; v1(1515,612) 1556.36,653.36 D81.1 ; v1(1685,614) 1724.36,653.36 D82.1 ; v1(1860,615) 1898.36,653.36 D83.1 ; v1(2025,615) 2063.36,653.36 D84.1
  Top Layer w15: v1(229,609) D15.1
  Bottom Layer w10: P2.5 140,956 140,622 178,584 205,584 ; v1(229,609) 205,585 205,584 ; v1(350,615) 319,584 ; v1(510,613) 481,584 ; v1(680,610) 654,584 ; v1(845,610) 819,584 ; v1(1015,612) 987,584 ; v1(1185,611) 1158,584 ; v1(1350,611) 1323,584 ; v1(1515,612) 1487,584 ; v1(1685,614) 1655,584 ; v1(1860,615) 1829,584 ; v1(2025,615) 1994,584 1829,584 ; 205,584 319,584 ; 319,584 481,584 ; 481,584 654,584 ; 654,584 819,584 ; 819,584 987,584 ; 987,584 1158,584 ; 1158,584 1323,584 ; 1323,584 1487,584 ; 1487,584 1655,584 ; 1655,584 1829,584
NetD25_1: D27.1 D28.1 D29.1 D30.1 D31.1 D32.1 D33.1 D34.1 D85.1 D86.1 D87.1 D88.1 P2.4 | length 3682.3
  Top Layer w10: v1(353,506) 394.17,547.17 D28.1 ; v1(510,509) 548.17,547.17 D29.1 ; v1(680,507) 720.17,547.17 D30.1 ; v1(850,506) 891.17,547.17 D31.1 ; v1(1015,504) 1058.17,547.17 D32.1 ; v1(1180,503) 1224.17,547.17 D33.1 ; v1(1350,507) 1390.17,547.17 D34.1 ; v1(1520,505) 1562.17,547.17 D85.1 ; v1(1690,508) 1729.17,547.17 D86.1 ; v1(1855,512) 1890.17,547.17 D87.1 ; v1(2025,505) 2067.17,547.17 D88.1
  Top Layer w15: v1(229,504) D27.1
  Bottom Layer w10: P2.4 120,926 120,527 169,478 205,478 ; v1(229,504) 205,480 205,478 ; v1(353,506) 325,478 ; v1(510,509) 479,478 ; v1(680,507) 651,478 ; v1(850,506) 822,478 ; v1(1015,504) 989,478 ; v1(1180,503) 1155,478 ; v1(1350,507) 1321,478 ; v1(1520,505) 1493,478 ; v1(1690,508) 1660,478 ; v1(1855,512) 1821,478 ; v1(2025,505) 1998,478 1821,478 ; 205,478 325,478 ; 325,478 479,478 ; 479,478 651,478 ; 651,478 822,478 ; 822,478 989,478 ; 989,478 1155,478 ; 1155,478 1321,478 ; 1321,478 1493,478 ; 1493,478 1660,478 ; 1660,478 1821,478
NetD41_1: D13.1 D14.1 D23.1 D24.1 D125_8.1 D125_9_1.1 D127_9.1 D128_8.1 D131_8.1 D131_9_1.1 D133_9.1 D134_8.1 P2.18 | length 3492.3
  Top Layer w10: v1(185,1995) 223.81,2033.81 D131_9_1.1 ; v1(350,1990) 393.81,2033.81 D125_9_1.1 ; v1(520,1995) 558.81,2033.81 D127_9.1 ; v1(690,1993) 730.81,2033.81 D133_9.1 ; v1(850,1989) 894.81,2033.81 D125_8.1 ; v1(1023,1992) 1064.81,2033.81 D128_8.1 ; v1(1188,1989) 1232.81,2033.81 D131_8.1 ; v1(1355,1991) 1397.81,2033.81 D134_8.1 ; v1(1521,1989) 1565.81,2033.81 D13.1 ; v1(1695,1995) 1733.81,2033.81 D14.1 ; v1(1858,1993) 1898.81,2033.81 D23.1 ; v1(2025,1990) 2068.81,2033.81 D24.1
  Bottom Layer w10: P2.18 61,1701 80,1720 80,1925 115,1960 150,1960 ; 151,1959 150,1960 ; v1(185,1995) 150,1960 ; v1(350,1990) 350,1985 325,1960 ; v1(520,1995) 485,1960 ; v1(690,1993) 657,1960 ; v1(850,1989) 821,1960 ; v1(1023,1992) 991,1960 ; v1(1188,1989) 1159,1960 ; v1(1355,1991) 1324,1960 ; v1(1521,1989) 1492,1960 ; v1(1695,1995) 1660,1960 ; v1(1858,1993) 1825,1960 ; v1(2025,1990) 1995,1960 1825,1960 ; 150,1960 325,1960 ; 325,1960 485,1960 ; 485,1960 657,1960 ; 657,1960 821,1960 ; 821,1960 991,1960 ; 991,1960 1159,1960 ; 1159,1960 1324,1960 ; 1324,1960 1492,1960 ; 1492,1960 1660,1960 ; 1660,1960 1825,1960
NetD45_1: D25.1 D26.1 D35.1 D36.1 D125_9.1 D126_8.1 D128_9.1 D131_9.1 D132_8.1 D134_9.1 D135_8.1 D136_8.1 P2.17 | length 3416
  Top Layer w10: v1(185,1889) 223.62,1927.62 D125_9.1 ; v1(346,1888) 385.62,1927.62 D128_9.1 ; v1(515,1888) 554.62,1927.62 D131_9.1 ; v1(685,1888) 724.62,1927.62 D134_9.1 ; v1(851,1887) 891.62,1927.62 D126_8.1 ; v1(1020,1887) 1060.62,1927.62 D132_8.1 ; v1(1190,1887) 1230.62,1927.62 D135_8.1 ; v1(1355,1889) 1393.62,1927.62 D136_8.1 ; v1(1525,1888) 1564.62,1927.62 D25.1 ; v1(1690,1886) 1731.62,1927.62 D26.1 ; v1(1860,1889) 1898.62,1927.62 D35.1 ; v1(2025,1884) 2068.62,1927.62 D36.1
  Bottom Layer w10: P2.17 51,1651 100,1700 100,1830 125,1855 150,1855 151,1856 ; v1(185,1889) 184,1889 151,1856 ; v1(346,1888) 314,1856 ; v1(515,1888) 484,1857 ; v1(685,1888) 654,1857 ; v1(851,1887) 821,1857 ; v1(1020,1887) 990,1857 ; v1(1190,1887) 1160,1857 ; v1(1355,1889) 1323,1857 ; v1(1525,1888) 1494,1857 ; v1(1690,1886) 1661,1857 ; v1(1860,1889) 1828,1857 ; v1(2025,1884) 1998,1857 1828,1857 ; 151,1856 314,1856 ; 314,1856 483,1856 484,1857 ; 484,1857 654,1857 ; 654,1857 821,1857 ; 821,1857 990,1857 ; 990,1857 1160,1857 ; 1160,1857 1323,1857 ; 1323,1857 1494,1857 ; 1494,1857 1661,1857 ; 1661,1857 1828,1857
NetD49_1: D37.1 D38.1 D39.1 D40.1 D125_1.1 D125_3.1 D125_5.1 D125_7.1 D131_1.1 D131_3.1 D131_5.1 D131_7.1 P2.16 | length 3340.1
  Top Layer w10: v1(184,1783) 222.43,1821.43 D125_7.1 ; v1(355,1783) 393.43,1821.43 D131_7.1 ; v1(510,1784) 547.43,1821.43 D125_5.1 ; v1(680,1786) 715.43,1821.43 D131_5.1 ; v1(850,1785) 886.43,1821.43 D125_3.1 ; v1(1015,1786) 1050.43,1821.43 D131_3.1 ; v1(1182,1784) 1219.43,1821.43 D125_1.1 ; v1(1350,1782) 1389.43,1821.43 D131_1.1 ; v1(1520,1783) 1558.43,1821.43 D37.1 ; v1(1685,1784) 1722.43,1821.43 D38.1 ; v1(1855,1783) 1893.43,1821.43 D39.1 ; v1(2025,1781) 2065.43,1821.43 D40.1
  Bottom Layer w10: P2.16 125,1681 125,1735 145,1755 156,1755 ; v1(184,1783) 156,1755 ; v1(355,1783) 355,1780 330,1755 ; v1(510,1784) 509,1784 480,1755 ; v1(680,1786) 649,1755 ; v1(850,1785) 820,1755 ; v1(1015,1786) 984,1755 ; v1(1182,1784) 1153,1755 ; v1(1350,1782) 1323,1755 ; v1(1520,1783) 1492,1755 ; v1(1685,1784) 1656,1755 ; v1(1855,1783) 1827,1755 ; v1(2025,1781) 1999,1755 1827,1755 ; 156,1755 330,1755 ; 330,1755 480,1755 ; 480,1755 649,1755 ; 649,1755 820,1755 ; 820,1755 984,1755 ; 984,1755 1153,1755 ; 1153,1755 1323,1755 ; 1323,1755 1492,1755 ; 1492,1755 1656,1755 ; 1656,1755 1827,1755
NetD53_1: D41.1 D42.1 D43.1 D44.1 D126_1.1 D126_3.1 D126_5.1 D126_7.1 D132_1.1 D132_3.1 D132_5.1 D132_7.1 P2.15 | length 3319.8
  Top Layer w10: v1(180,1673) 222.24,1715.24 D126_7.1 ; v1(349,1677) 387.24,1715.24 D132_7.1 ; v1(510,1672) 553.24,1715.24 D126_5.1 ; v1(675,1672) 718.24,1715.24 D132_5.1 ; v1(850,1672) 893.24,1715.24 D126_3.1 ; v1(1015,1671) 1059.24,1715.24 D132_3.1 ; v1(1180,1674) 1221.24,1715.24 D126_1.1 ; v1(1350,1676) 1389.24,1715.24 D132_1.1 ; v1(1520,1674) 1561.25,1715.25 D41.1 ; v1(1685,1673) 1727.25,1715.25 D42.1 ; v1(1850,1672) 1893.25,1715.25 D43.1 ; v1(2025,1672) 2068.25,1715.25 D44.1
  Bottom Layer w10: P2.15 46,1551 140,1645 150,1645 ; v1(180,1673) 178,1673 150,1645 ; v1(349,1677) 317,1645 ; v1(510,1672) 483,1645 ; v1(675,1672) 648,1645 ; v1(850,1672) 823,1645 ; v1(1015,1671) 989,1645 ; v1(1180,1674) 1151,1645 ; v1(1350,1676) 1319,1645 ; v1(1520,1674) 1491,1645 ; v1(1685,1673) 1657,1645 ; v1(1850,1672) 1823,1645 ; v1(2025,1672) 1998,1645 1823,1645 ; 150,1645 317,1645 ; 317,1645 483,1645 ; 483,1645 648,1645 ; 648,1645 823,1645 ; 823,1645 989,1645 ; 989,1645 1151,1645 ; 1151,1645 1319,1645 ; 1319,1645 1491,1645 ; 1491,1645 1657,1645 ; 1657,1645 1823,1645
NetD57_1: D45.1 D46.1 D47.1 D48.1 D127_1.1 D127_3.1 D127_5.1 D127_7.1 D133_1.1 D133_3.1 D133_5.1 D133_7.1 P2.14 | length 3285
  Top Layer w10: v1(180,1568) 221.06,1609.06 D127_7.1 ; v1(350,1570) 389.06,1609.06 D133_7.1 ; v1(510,1569) 550.06,1609.06 D127_5.1 ; v1(680,1570) 719.06,1609.06 D133_5.1 ; v1(850,1569) 890.06,1609.06 D127_3.1 ; v1(1015,1568) 1056.06,1609.06 D133_3.1 ; v1(1180,1570) 1219.06,1609.06 D127_1.1 ; v1(1350,1567) 1392.06,1609.06 D133_1.1 ; v1(1515,1570) 1554.06,1609.06 D45.1 ; v1(1685,1568) 1726.06,1609.06 D46.1 ; v1(1850,1565) 1894.06,1609.06 D47.1 ; v1(2025,1565) 2069.06,1609.06 D48.1
  Bottom Layer w10: P2.14 56,1501 95,1540 155,1540 ; v1(180,1568) 180,1565 155,1540 ; v1(350,1570) 350,1565 325,1540 ; v1(510,1569) 510,1565 485,1540 ; v1(680,1570) 680,1565 655,1540 ; v1(850,1569) 849,1569 820,1540 ; v1(1015,1568) 987,1540 ; v1(1180,1570) 1150,1540 ; v1(1350,1567) 1323,1540 ; v1(1515,1570) 1485,1540 ; v1(1685,1568) 1657,1540 ; v1(1850,1565) 1825,1540 ; v1(2025,1565) 2000,1540 1825,1540 ; 155,1540 325,1540 ; 325,1540 485,1540 ; 485,1540 655,1540 ; 655,1540 820,1540 ; 820,1540 987,1540 ; 987,1540 1150,1540 ; 1150,1540 1323,1540 ; 1323,1540 1485,1540 ; 1485,1540 1657,1540 ; 1657,1540 1825,1540
NetD61_1: D49.1 D50.1 D51.1 D52.1 D128_1.1 D128_3.1 D128_5.1 D128_7.1 D134_1.1 D134_3.1 D134_5.1 D134_7.1 P2.13 | length 3295.2
  Top Layer w10: v1(184,1461) 225.87,1502.87 D128_7.1 ; v1(350,1463) 389.87,1502.87 D134_7.1 ; v1(505,1457) 550.87,1502.87 D128_5.1 ; v1(680,1461) 721.87,1502.87 D134_5.1 ; v1(850,1459) 893.87,1502.87 D128_3.1 ; v1(1015,1459) 1058.87,1502.87 D134_3.1 ; v1(1185,1457) 1230.87,1502.87 D128_1.1 ; v1(1350,1461) 1391.87,1502.87 D134_1.1 ; v1(1520,1460) 1562.87,1502.87 D49.1 ; v1(1685,1457) 1730.87,1502.87 D50.1 ; v1(1850,1460) 1892.87,1502.87 D51.1 ; v1(2025,1463) 2064.87,1502.87 D52.1
  Bottom Layer w10: P2.13 144,1451 157,1438 ; v1(184,1461) 180,1461 157,1438 ; v1(350,1463) 350,1460 320,1430 ; v1(505,1457) 505,1455 480,1430 ; v1(680,1461) 649,1430 ; v1(850,1459) 821,1430 ; v1(1015,1459) 986,1430 ; v1(1185,1457) 1158,1430 ; v1(1350,1461) 1319,1430 ; v1(1520,1460) 1490,1430 ; v1(1685,1457) 1658,1430 ; v1(1850,1460) 1820,1430 ; v1(2025,1463) 1992,1430 1820,1430 ; 157,1438 165,1430 320,1430 ; 320,1430 480,1430 ; 480,1430 649,1430 ; 649,1430 821,1430 ; 821,1430 986,1430 ; 986,1430 1158,1430 ; 1158,1430 1319,1430 ; 1319,1430 1490,1430 ; 1490,1430 1658,1430 ; 1658,1430 1820,1430
NetD65_1: D53.1 D54.1 D55.1 D56.1 D135_1.1 D135_3.1 D135_5.1 D135_7.1 D136_1.1 D136_3.1 D136_5.1 D136_7.1 P2.12 | length 3326.2
  Top Layer w10: v1(180,1355) 221.68,1396.68 D135_7.1 ; v1(350,1358) 388.68,1396.68 D136_7.1 ; v1(510,1356) 550.68,1396.68 D135_5.1 ; v1(675,1352) 719.68,1396.68 D136_5.1 ; v1(850,1357) 889.68,1396.68 D135_3.1 ; v1(1015,1349) 1062.68,1396.68 D136_3.1 ; v1(1180,1354) 1222.68,1396.68 D135_1.1 ; v1(1350,1353) 1393.68,1396.68 D136_1.1 ; v1(1515,1354) 1557.68,1396.68 D53.1 ; v1(1685,1354) 1727.68,1396.68 D54.1 ; v1(1850,1355) 1891.68,1396.68 D55.1 ; v1(2025,1352) 2069.68,1396.68 D56.1
  Bottom Layer w10: P2.12 89,1401 165,1325 ; v1(180,1355) 180,1340 165,1325 ; v1(350,1358) 317,1325 ; v1(510,1356) 479,1325 ; v1(675,1352) 648,1325 ; v1(850,1357) 818,1325 ; v1(1015,1349) 991,1325 ; v1(1180,1354) 1151,1325 ; v1(1350,1353) 1322,1325 ; v1(1515,1354) 1486,1325 ; v1(1685,1354) 1656,1325 ; v1(1850,1355) 1820,1325 ; v1(2025,1352) 1998,1325 1820,1325 ; 165,1325 317,1325 ; 317,1325 479,1325 ; 479,1325 648,1325 ; 648,1325 818,1325 ; 818,1325 991,1325 ; 991,1325 1151,1325 ; 1151,1325 1322,1325 ; 1322,1325 1486,1325 ; 1486,1325 1656,1325 ; 1656,1325 1820,1325
NetD69_1: D57.1 D58.1 D59.1 D60.1 D125_2.1 D125_4.1 D125_6.1 D131_2.1 D131_4.1 D131_6.1 D135.1 D136.1 P2.11 | length 3339.9
  Top Layer w10: v1(181.49,1290.49) D125_6.1 ; v1(350,1251) 389.49,1290.49 D131_6.1 ; v1(510,1249) 551.49,1290.49 D125_4.1 ; v1(675,1247) 718.49,1290.49 D131_4.1 ; v1(850,1249) 891.49,1290.49 D125_2.1 ; v1(1015,1249) 1056.49,1290.49 D131_2.1 ; v1(1180,1249) 1221.49,1290.49 D136.1 ; v1(1350,1251) 1389.49,1290.49 D135.1 ; v1(1520,1250) 1560.49,1290.49 D57.1 ; v1(1685,1247) 1728.49,1290.49 D58.1 ; v1(1850,1245) 1895.49,1290.49 D59.1 ; v1(2025,1248) 2067.49,1290.49 D60.1
  Bottom Layer w10: P2.11 58,1351 181,1228 ; v1(181.49,1290.49) 181.49,1228.49 181,1228 ; v1(350,1251) 345,1251 315,1221 ; v1(510,1249) 510,1246 485,1221 ; v1(675,1247) 671,1247 645,1221 ; v1(850,1249) 850,1246 825,1221 ; v1(1015,1249) 1015,1246 990,1221 ; v1(1180,1249) 1173,1249 1145,1221 ; v1(1350,1251) 1350,1246 1325,1221 ; v1(1520,1250) 1520,1246 1495,1221 ; 1656,1222 1681,1247 v1(1685,1247) ; v1(1850,1245) 1850,1241 1830,1221 ; v1(2025,1248) 2025,1241 2005,1221 1830,1221 ; 181,1228 188,1221 315,1221 ; 315,1221 485,1221 ; 485,1221 645,1221 ; 645,1221 825,1221 ; 825,1221 990,1221 ; 990,1221 1145,1221 ; 1145,1221 1325,1221 ; 1325,1221 1495,1221 ; 1495,1221 1830,1221
NetD73_1: D61.1 D62.1 D63.1 D64.1 D126_2.1 D126_4.1 D126_6.1 D128.1 D132_2.1 D132_4.1 D132_6.1 D134.1 P2.10 | length 3296.8
  Top Layer w10: v1(180.7,1184.3) D126_6.1 ; v1(350,1145) 389.3,1184.3 D132_6.1 ; v1(510,1145) 549.3,1184.3 D126_4.1 ; v1(675,1142) 717.3,1184.3 D132_4.1 ; v1(850,1142) 892.3,1184.3 D126_2.1 ; v1(1015,1142) 1057.3,1184.3 D132_2.1 ; v1(1180,1143) 1221.3,1184.3 D134.1 ; v1(1350,1147) 1387.3,1184.3 D128.1 ; v1(1515,1143) 1556.3,1184.3 D61.1 ; v1(1685,1143) 1726.3,1184.3 D62.1 ; v1(1850,1140) 1894.3,1184.3 D63.1 ; v1(2025,1141) 2068.3,1184.3 D64.1
  Bottom Layer w10: P2.10 53,1301 169.7,1184.3 169.7,1158.76 212.46,1116 321,1116 ; v1(350,1145) 321,1116 ; v1(510,1145) 481,1116 ; v1(675,1142) 649,1116 ; v1(850,1142) 824,1116 ; v1(1015,1142) 989,1116 ; v1(1180,1143) 1153,1116 ; v1(1350,1147) 1319,1116 ; v1(1515,1143) 1488,1116 ; v1(1685,1143) 1658,1116 ; v1(1850,1140) 1826,1116 ; v1(2025,1141) 2000,1116 1826,1116 ; 321,1116 481,1116 ; 481,1116 649,1116 ; 649,1116 824,1116 ; 824,1116 989,1116 ; 989,1116 1153,1116 ; 1153,1116 1319,1116 ; 1319,1116 1488,1116 ; 1488,1116 1658,1116 ; 1658,1116 1826,1116
NetD77_1: D65.1 D66.1 D67.1 D68.1 D127.1 D127_2.1 D127_4.1 D127_6.1 D133.1 D133_2.1 D133_4.1 D133_6.1 P2.9 | length 3406.3
  Top Layer w10: v1(229,1033) D127_6.1 ; v1(355,1039) 394.11,1078.11 D133_6.1 ; v1(505,1037) 546.11,1078.11 D127_4.1 ; v1(675,1035) 718.11,1078.11 D133_4.1 ; v1(850,1035) 893.11,1078.11 D127_2.1 ; v1(1015,1038) 1055.11,1078.11 D133_2.1 ; v1(1180,1042) 1216.11,1078.11 D133.1 ; v1(1350,1040) 1388.11,1078.11 D127.1 ; v1(1520,1038) 1560.11,1078.11 D65.1 ; v1(1685,1038) 1725.11,1078.11 D66.1 ; v1(1850,1037) 1891.11,1078.11 D67.1 ; v1(2025,1040) 2063.11,1078.11 D68.1
  Bottom Layer w10: P2.9 52,1251 175,1128 175,1035 201,1009 205,1009 ; v1(229,1033) 205,1009 ; v1(355,1039) 325,1009 ; v1(505,1037) 477,1009 ; v1(675,1035) 649,1009 ; v1(850,1035) 824,1009 ; v1(1015,1038) 986,1009 ; v1(1180,1042) 1147,1009 ; v1(1350,1040) 1319,1009 ; v1(1520,1038) 1491,1009 ; v1(1685,1038) 1656,1009 ; v1(1850,1037) 1822,1009 ; v1(2025,1040) 1994,1009 1822,1009 ; 205,1009 325,1009 ; 325,1009 477,1009 ; 477,1009 649,1009 ; 649,1009 824,1009 ; 824,1009 986,1009 ; 986,1009 1147,1009 ; 1147,1009 1319,1009 ; 1319,1009 1491,1009 ; 1491,1009 1656,1009 ; 1656,1009 1822,1009
NetD81_1: D69.1 D70.1 D71.1 D72.1 D126.1 D128_2.1 D128_4.1 D128_6.1 D132.1 D134_2.1 D134_4.1 D134_6.1 P2.8 | length 3439.4
  Top Layer w10: D128_6.1 229,951 v1(250,930) ; v1(350,936) 385.92,971.92 D134_6.1 ; v1(510,928) 553.92,971.92 D128_4.1 ; v1(675,927) 719.92,971.92 D134_4.1 ; v1(850,930) 891.92,971.92 D128_2.1 ; v1(1015,931) 1055.92,971.92 D134_2.1 ; v1(1180,933) 1218.92,971.92 D132.1 ; v1(1350,935) 1386.92,971.92 D126.1 ; v1(1520,933) 1558.92,971.92 D69.1 ; v1(1690,934) 1727.92,971.92 D70.1 ; v1(1850,930) 1891.92,971.92 D71.1 ; v1(2025,932) 2064.92,971.92 D72.1
  Bottom Layer w10: P2.8 50,1201 130,1121 130,1047 205,972 205,940 231,914 ; v1(250,930) 247,930 231,914 ; v1(350,936) 350,932 320,902 ; v1(510,928) 510,927 485,902 ; v1(675,927) 650,902 ; v1(850,930) 822,902 ; v1(1015,931) 986,902 ; v1(1180,933) 1149,902 ; v1(1350,935) 1317,902 ; v1(1520,933) 1489,902 ; v1(1690,934) 1658,902 ; v1(1850,930) 1822,902 ; v1(2025,932) 1995,902 1822,902 ; 231,914 243,902 320,902 ; 320,902 485,902 ; 485,902 650,902 ; 650,902 822,902 ; 822,902 986,902 ; 986,902 1149,902 ; 1149,902 1317,902 ; 1317,902 1489,902 ; 1489,902 1658,902 ; 1658,902 1822,902
NetD85_1: D73.1 D74.1 D75.1 D76.1 D125.1 D131.1 D135_2.1 D135_4.1 D135_6.1 D136_2.1 D136_4.1 D136_6.1 P2.7 | length 3565
  Top Layer w10: v1(229,822) D135_6.1 ; v1(350,828) 387.73,865.73 D136_6.1 ; v1(510,821) 554.73,865.73 D135_4.1 ; v1(675,821) 719.73,865.73 D136_4.1 ; v1(850,824) 891.73,865.73 D135_2.1 ; v1(1010,821) 1054.73,865.73 D136_2.1 ; v1(1180,824) 1221.73,865.73 D131.1 ; v1(1350,824) 1391.73,865.73 D125.1 ; v1(1515,817) 1563.73,865.73 D73.1 ; v1(1685,829) 1721.73,865.73 D74.1 ; v1(1850,824) 1891.73,865.73 D75.1 ; v1(2025,824) 2066.73,865.73 D76.1
  Bottom Layer w10: P2.7 50,1151 105,1096 105,1040.5 180,965.5 180,816 203,793 ; v1(229,822) 229,819 203,793 ; v1(350,828) 315,793 ; v1(510,821) 482,793 ; v1(675,821) 647,793 ; v1(850,824) 819,793 ; v1(1010,821) 982,793 ; v1(1180,824) 1149,793 ; v1(1350,824) 1319,793 ; v1(1515,817) 1491,793 ; v1(1685,829) 1649,793 ; v1(1850,824) 1819,793 ; v1(2025,824) 1994,793 1819,793 ; 203,793 315,793 ; 315,793 482,793 ; 482,793 647,793 ; 647,793 819,793 ; 819,793 982,793 ; 982,793 1149,793 ; 1149,793 1319,793 ; 1319,793 1491,793 ; 1491,793 1649,793 ; 1649,793 1819,793
NetD89_1: D89.1 D90.1 D91.1 D92.1 D93.1 D94.1 D95.1 D96.1 D97.1 D98.1 D99.1 D100.1 P2.3 | length 3745.1
  Top Layer w10: v1(350,403) 387.98,440.98 D90.1 ; v1(510,404) 546.98,440.98 D91.1 ; v1(675,400) 715.98,440.98 D92.1 ; v1(850,404) 886.98,440.98 D93.1 ; v1(1015,399) 1056.98,440.98 D94.1 ; v1(1180,399) 1221.98,440.98 D95.1 ; v1(1350,400) 1390.98,440.98 D96.1 ; v1(1515,399) 1556.98,440.98 D97.1 ; v1(1695,401) 1734.98,440.98 D98.1 ; v1(1860,405) 1895.98,440.98 D99.1 ; v1(2025,402) 2063.98,440.98 D100.1
  Top Layer w15: v1(229,399) D89.1
  Bottom Layer w10: P2.3 100,896 100,439 167,372 205,372 ; v1(229,399) 229,396 205,372 ; v1(350,403) 350,397 325,372 ; v1(510,404) 510,402 480,372 ; v1(675,400) 647,372 ; v1(850,404) 818,372 ; v1(1015,399) 988,372 ; v1(1180,399) 1153,372 ; v1(1350,400) 1322,372 ; v1(1515,399) 1488,372 ; v1(1695,401) 1666,372 ; v1(1860,405) 1827,372 ; v1(2025,402) 1995,372 1827,372 ; 205,372 325,372 ; 325,372 480,372 ; 480,372 647,372 ; 647,372 818,372 ; 818,372 988,372 ; 988,372 1153,372 ; 1153,372 1322,372 ; 1322,372 1488,372 ; 1488,372 1666,372 ; 1666,372 1827,372
NetD101_1: D101.1 D102.1 D103.1 D104.1 D105.1 D106.1 D107.1 D108.1 D109.1 D110.1 D111.1 D112.1 P2.2 | length 3723.8
  Top Layer w10: v1(350,297) 387.79,334.79 D102.1 ; v1(520,297) 557.79,334.79 D103.1 ; v1(675,295) 714.79,334.79 D104.1 ; v1(855,295) 894.79,334.79 D105.1 ; v1(1025,296) 1063.79,334.79 D106.1 ; v1(1190,295) 1229.79,334.79 D107.1 ; v1(1355,295) 1394.79,334.79 D108.1 ; v1(1520,294) 1560.79,334.79 D109.1 ; v1(1695,294) 1735.79,334.79 D110.1 ; v1(1855,296) 1893.79,334.79 D111.1 ; v1(2025,296) 2063.79,334.79 D112.1
  Top Layer w15: v1(229,290) D101.1
  Bottom Layer w10: P2.2 54,901 80,875 80,370 182,268 205,268 ; v1(229,290) 227,290 205,268 ; v1(350,297) 350,293 325,268 ; v1(520,297) 520,293 495,268 ; v1(675,295) 675,293 650,268 ; v1(855,295) 828,268 ; v1(1025,296) 997,268 ; v1(1190,295) 1163,268 ; v1(1355,295) 1328,268 ; v1(1520,294) 1494,268 ; v1(1695,294) 1669,268 ; v1(1855,296) 1827,268 ; v1(2025,296) 1997,268 1827,268 ; 205,268 325,268 ; 325,268 495,268 ; 495,268 650,268 ; 650,268 828,268 ; 828,268 997,268 ; 997,268 1163,268 ; 1163,268 1328,268 ; 1328,268 1494,268 ; 1494,268 1669,268 ; 1669,268 1827,268
NetD113_1: D113.1 D114.1 D115.1 D116.1 D117.1 D118.1 D119.1 D120.1 D121.1 D122.1 D123.1 D124.1 P2.1 | length 3808.9
  Top Layer w10: v1(350,185) 393.6,228.6 D114.1 ; v1(515,182) 561.6,228.6 D115.1 ; v1(690,182) 732.62,224.62 D116.1 ; v1(850,183) 895.6,228.6 D117.1 ; v1(1020,180) 1068.37,228.37 D118.1 ; v1(1190,179) 1236.24,225.24 D119.1 ; v1(1355,183) 1400.6,228.6 D120.1 ; v1(1525,179) 1571.99,225.99 D121.1 ; v1(1685,180) 1733.6,228.6 D122.1 ; v1(1850,175) 1903.6,228.6 D123.1 ; v1(2025,179) 2074.6,228.6 D124.1
  Top Layer w15: D113.1 229,210 v1(255,184)
  Bottom Layer w10: P2.1 45,330 220,155 ; v1(255,184) 254,184 225,155 320,155 ; v1(350,185) 320,155 ; v1(515,182) 488,155 ; v1(690,182) 663,155 ; v1(850,183) 822,155 ; v1(1020,180) 995,155 ; v1(1190,179) 1166,155 ; v1(1355,183) 1327,155 ; v1(1525,179) 1501,155 ; v1(1685,180) 1660,155 ; v1(1850,175) 1830,155 ; v1(2025,179) 2001,155 1830,155 ; 320,155 488,155 ; 488,155 663,155 ; 663,155 822,155 ; 822,155 995,155 ; 995,155 1166,155 ; 1166,155 1327,155 ; 1327,155 1501,155 ; 1501,155 1660,155 ; 1660,155 1830,155
pads on no net: Designator120.0 Designator121.0 Designator124.0 Designator125.0
copper on no net:
  other v1: 145.13,2189.68
  other v2: 71,71 2291,71 71,2291 2291,2291

## Silkscreen, mask and mechanical layers (free items; w line width, h text height)
Top Overlay:
  text "12" at 1525,2337 h20
  text "1" at 848,2333 h20
  text "12" at 2101,2204 h20
  text "1" at 260,2203 h20
  text "1" at 36,1813 h20
  text "19" at 35,785 h20
  text "19" at 160,163 h20
Mechanical 1:
  the board outline again, w7.87